# Altium PCB DAQ-2-A.PcbDoc
Units mil, origin at the board's own origin, x right, y up, seen from the top; angles counter-clockwise.
Board outline 3464.57 x 2204.72 mil, 2 copper layers (Top Layer, Bottom Layer); 77 components, 59 nets, 289 pads, 107 vias.
Unrouted connection lines stored in the file: 2.
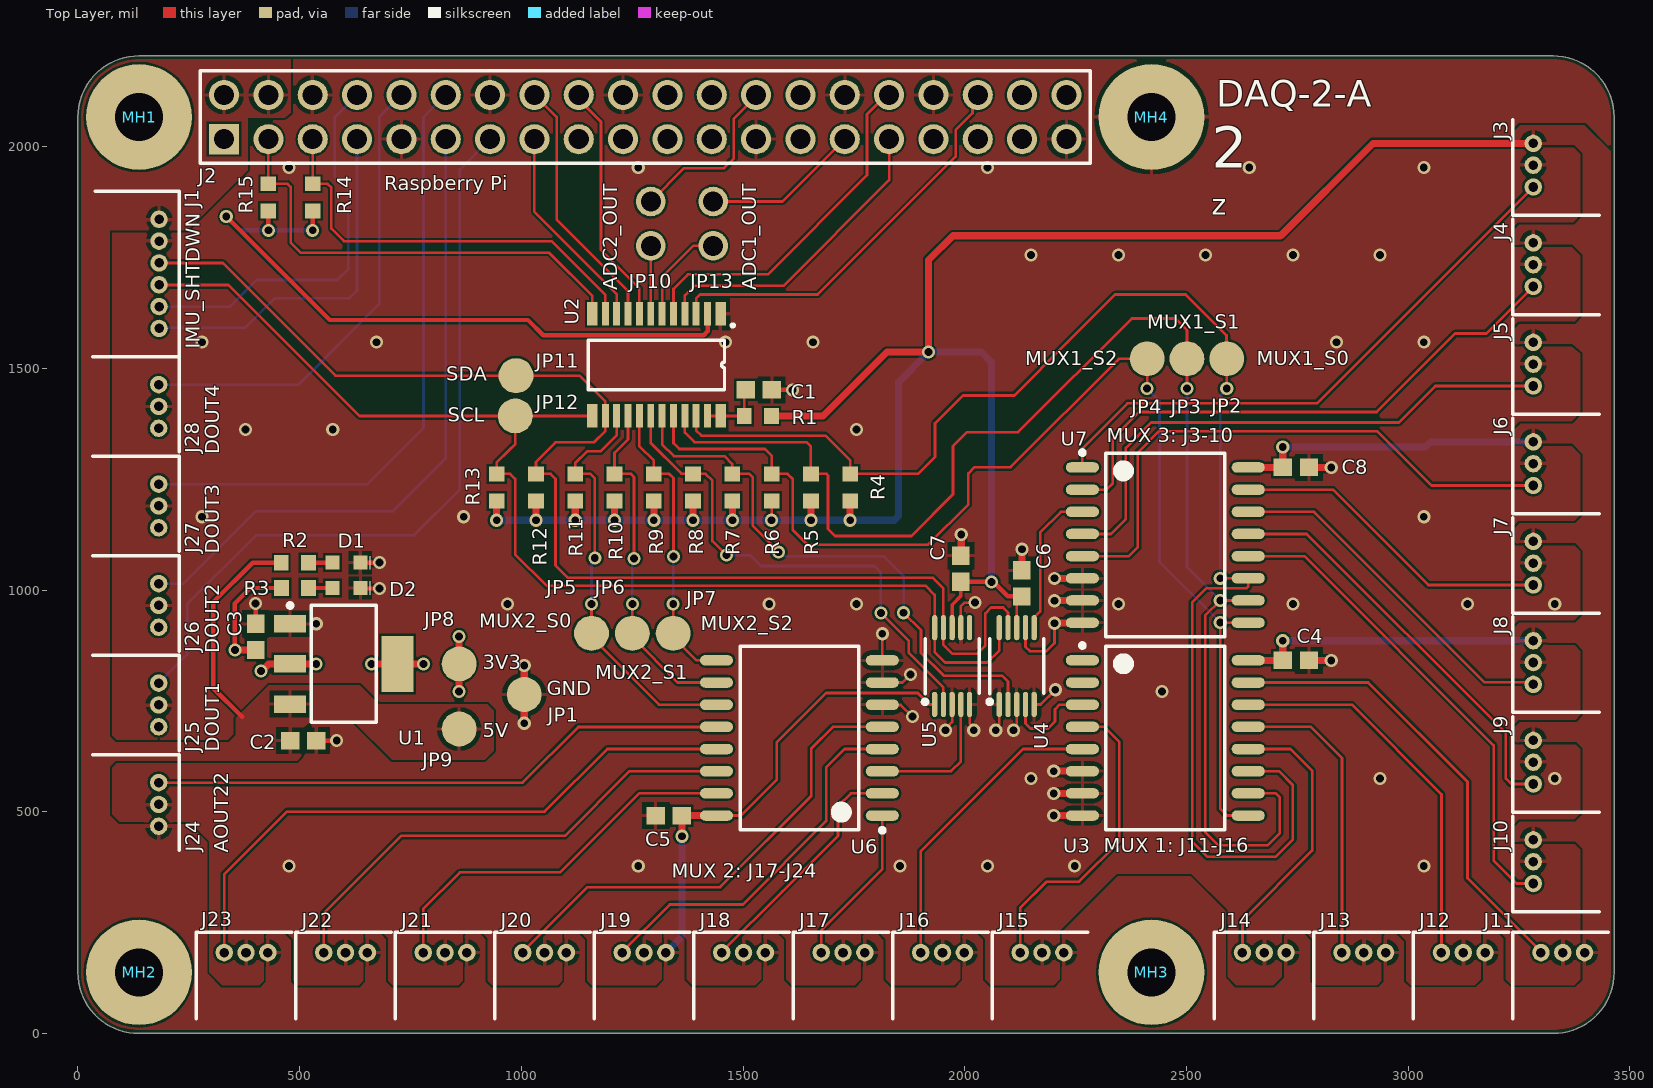
[diagram p0: Top Layer view]
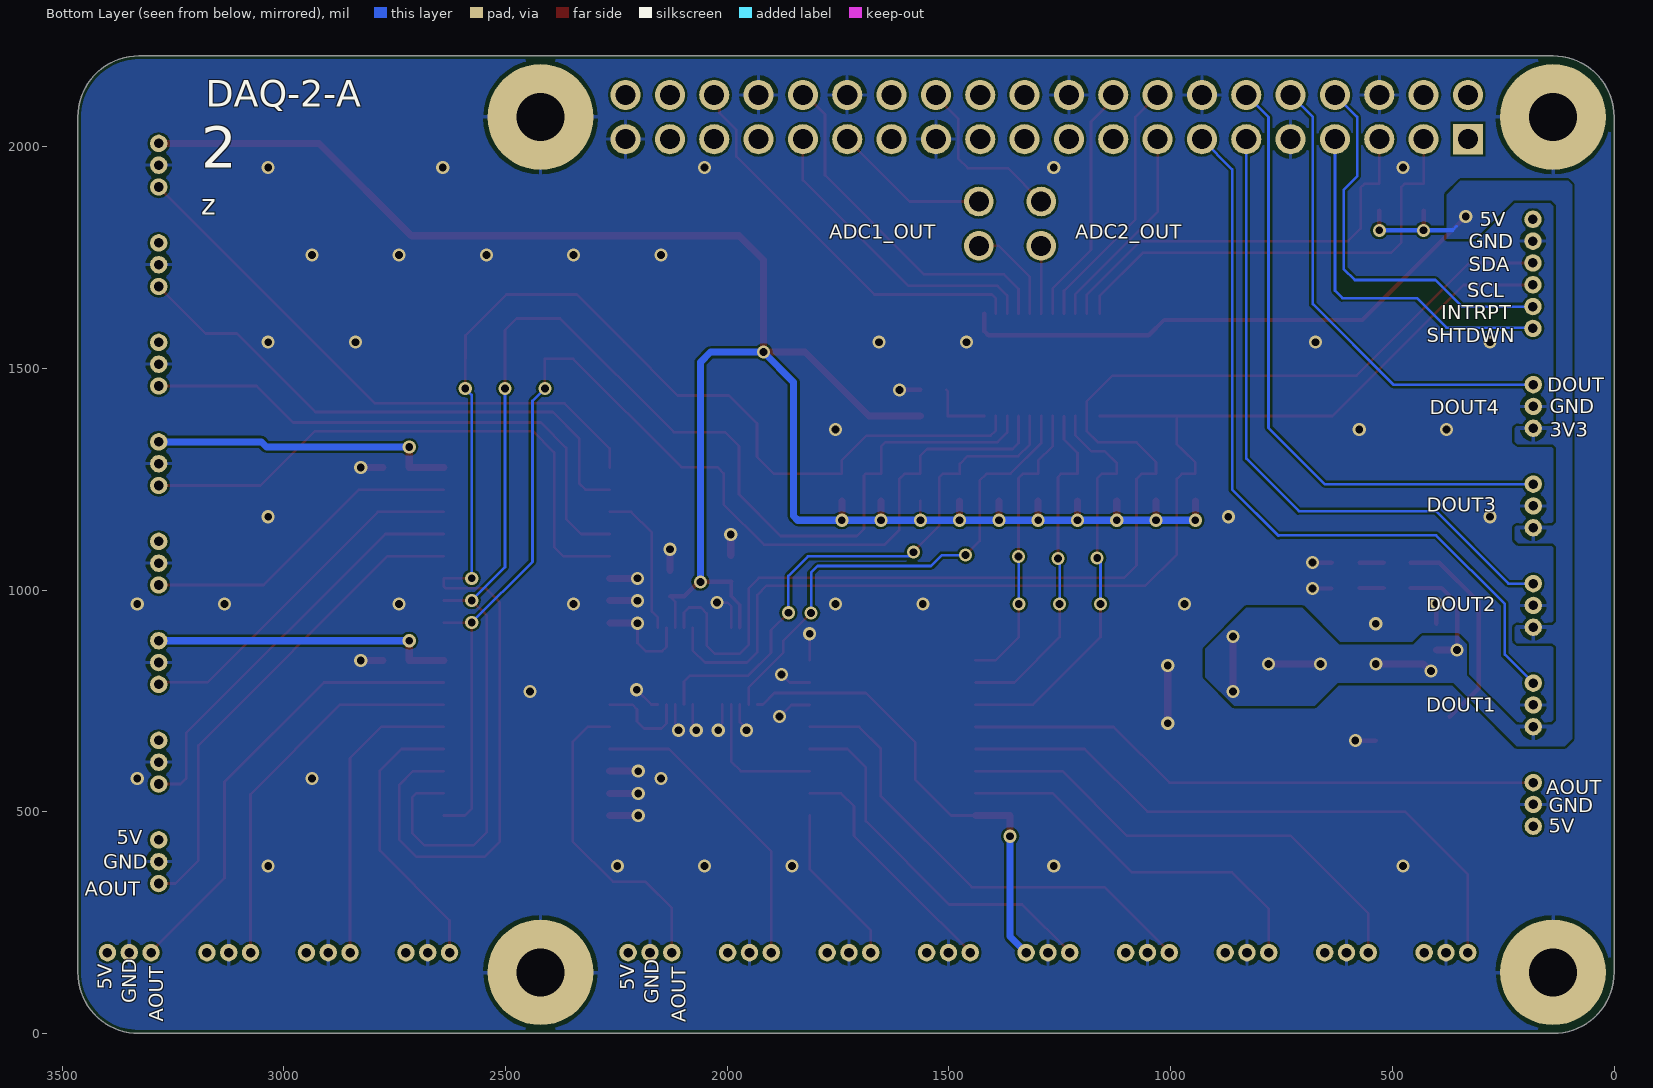
[diagram p1: Bottom Layer view, seen from below]
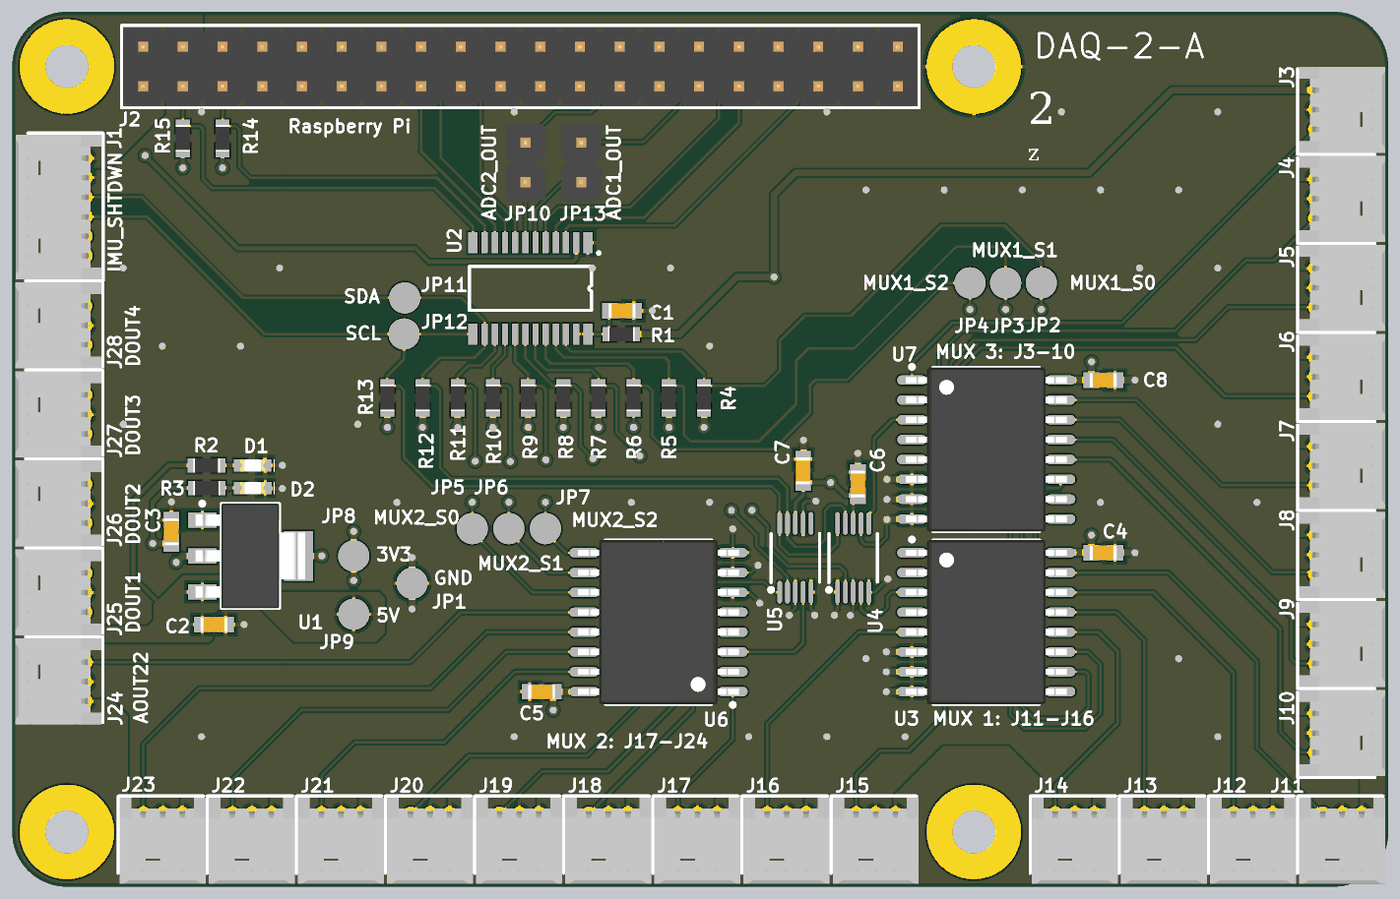
[diagram p2: 3D render of the assembled board from above, using the file's embedded part models]

## Layer stack, top to bottom
Top Solder: solder mask 0.4, Solder Resist, Dk 3.5
Top Layer: signal copper 1.4
Dielectric 1: dielectric 12.6, FR-4, Dk 4.8
Bottom Layer: signal copper 1.4
Bottom Solder: solder mask 0.4, Solder Resist, Dk 3.5

## Board outline
137.8,0 cw(c137.35,137.35) 0,137.8 0,2066.93 cw(c137.35,2067.37) 137.8,2204.72 3326.77,2204.72 cw(c3327.21,2067.37) 3464.57,2066.93 3464.57,137.8 cw(c3327.21,137.35) 3326.77,0

## Design rules (kind name [scope] priority, off if disabled: settings)
BoardOutlineClearance [All] p1: gap=7.87 ignorepadtopadclearanceinfootprint=FALSE
Clearance "Stitching HV_GND" [IsStitchingVia and InNet('HV_GND') vs (IsVia and (Not IsStitchingVia)) Or IsPad] p1: gap=5 ignorepadtopadclearanceinfootprint=FALSE
Clearance [All] p2: gap=5 ignorepadtopadclearanceinfootprint=FALSE except(7.87: Arc-SMDPad Track-SMDPad THPad-THPad; 9.84: SMDPad-Hole THPad-Hole Via-Hole Fill-Hole Poly-Hole Region-Hole Text-Hole; 10: Arc-Via Arc-Hole Track-Via Track-Hole Via-Via; 12.99: Arc-THPad Track-THPad; 21.26: SMDPad-THPad)
ComponentClearance [All] p1: gap=5 collisioncheckmode=3 verticalgap=5 showdistances=TRUE
DiffPairsRouting [All] p1: maxlimit=10 minlimit=5 mostfreqgap=5 toplayer_minwidth=5 toplayer_maxwidth=1000 toplayer_prefwidth=5 bottomlayer_minwidth=5 bottomlayer_maxwidth=1000 bottomlayer_prefwidth=5 maxuncoupledlength=500
Height [All] p1: minheight=0 maxheight=71497.94 prefheight=500
HoleSize [All] p1: absolutevalues=TRUE maxlimit=248.03 minlimit=11.81 maxpercent=80.000 minpercent=20.000
HoleToHoleClearance [All] p1: gap=9.84 allowstackedmicrovias=FALSE
MinimumAnnularRing [All] p1: minimumring=3
MinimumSolderMaskSliver [All] p1: minsoldermaskwidth=0
PlaneClearance [All] p1: clearance=5
PlaneConnect PlaneConnectPowerPads [InPadClass('PowerPads')] p1: planeconnectstyle=Direct reliefexpansion=20 reliefentries=4 reliefconductorwidth=10 reliefairgap=10
PlaneConnect [All] p2: pad.planeconnectstyle=Relief pad.reliefexpansion=11.81 pad.reliefentries=4 pad.reliefconductorwidth=10 pad.reliefairgap=5 via.planeconnectstyle=Direct via.reliefexpansion=11.81 via.reliefentries=4 via.reliefconductorwidth=5 via.reliefairgap=5
PolygonConnect PolygonConnectPowerPads [All vs (InPadClass('PowerPads'))] p1: connectstyle=Direct reliefconductorwidth=10 reliefentries=4 polygonreliefangle="90 Angle" airgapwidth=10
PolygonConnect [All] p2: thpad.connectstyle=Relief thpad.reliefconductorwidth=8 thpad.reliefentries=4 thpad.polygonreliefangle="90 Angle" thpad.airgapwidth=10 smdpad.connectstyle=Relief smdpad.reliefconductorwidth=8 smdpad.reliefentries=4 smdpad.polygonreliefangle="90 Angle" smdpad.airgapwidth=10 via.connectstyle=Direct via.reliefconductorwidth=8 via.reliefentries=4 via.polygonreliefangle="90 Angle" via.airgapwidth=10
RoutingVias [All] p1: holewidth=17.72 width=29.53 viastyle="Through Hole" minholewidth=11.81 minwidth=23.62 maxholewidth=23.62 maxwidth=259.84
SilkToSilkClearance [All] p1: silktosilkclearance=0
SilkToSolderMaskClearance [IsPad] p1: minsilkscreentomaskgap=0 clearancetoexposedcopper=TRUE
SolderMaskExpansion SolderMaskExpansion_Via [IsVia] p1: expansion=4 istentingtop=TRUE
SolderMaskExpansion [All] p2: expansion=2.95 istentingtop=FALSE
Width [All] p1: maxlimit=1000 minlimit=5.12 preferedwidth=6 minimp=50.000000 maximp=50.000000 favimp=50.000000
20 further rules are at their usual default settings.

## Classes and differential pairs
component class U_Connectors: J1 J2 J3 J4 J5 J6 J7 J8 J9 J10 J11 J12 J13 J14 J15 J16 J17 J18 J19 J20 J21 J22 J23 J24 J25 J26 J27 J28 JP8 JP9 JP10 JP11 JP12 JP13 R15
component class U_ADC_Level: C1 C2 C3 C4 C5 C6 C7 C8 D1 D2 JP2 JP3 JP4 JP5 JP6 JP7 R1 R2 R3 R4 R5 R6 R7 R8 R9 R10 R11 R12 R13 U1 U2 U3 U4 U5 U6 U7
component class root: JP1 MH1 MH2 MH3 MH4

## Components (designator, comment, footprint, x,y, rotation, side; value= is the part's Value field where it differs from the comment)
C1 "0.1uF" CAP-0603 1535.43,1451.57 r180 top
C2 "1uF" CAP-0603 508.06,660.63 r180 top
C3 "1uF" CAP-0603 400.79,894.49 r270 top
C4 "0.1uF" CAP-0603 2746.85,841.54 r180 top
C5 "0.1uF" CAP-0603 1332.68,491.34 r0 top
C6 "0.1uF" CAP-0603 2129.13,1014.96 r270 top
C7 "0.1uF" CAP-0603 1991.34,1048.03 r270 top
C8 "0.1uF" CAP-0603 2746.85,1276.57 r180 top
D1 "Green" LED-0603 652.56,1093.31 r180 top
D2 "Red" LED-0603 652.76,1036.22 r180 top
J1 "WM1744-ND" 1X6_1.25MM 183.07,1590.16 r90 top
J2 "61304021121" 2x40_Header 329.53,2016.89 r0 top
J3 "WM1743-ND" 1X3_1.25MM 3282.28,2007.48 r270 top
J4 "WM1743-ND" 1X3_1.25MM 3282.28,1783.07 r270 top
J5 "WM1743-ND" 1X3_1.25MM 3282.28,1558.66 r270 top
J6 "WM1743-ND" 1X3_1.25MM 3282.28,1334.25 r270 top
J7 "WM1743-ND" 1X3_1.25MM 3282.28,1109.84 r270 top
J8 "WM1743-ND" 1X3_1.25MM 3282.28,885.83 r270 top
J9 "WM1743-ND" 1X3_1.25MM 3282.28,661.02 r270 top
J10 "WM1743-ND" 1X3_1.25MM 3282.28,436.61 r270 top
J11 "WM1743-ND" 1X3_1.25MM 3398.03,182.28 r180 top
J12 "WM1743-ND" 1X3_1.25MM 3173.62,182.28 r180 top
J13 "WM1743-ND" 1X3_1.25MM 2949.21,182.28 r180 top
J14 "WM1743-ND" 1X3_1.25MM 2724.8,182.28 r180 top
J15 "WM1743-ND" 1X3_1.25MM 2223.62,182.28 r180 top
J16 "WM1743-ND" 1X3_1.25MM 1999.21,182.28 r180 top
J17 "WM1743-ND" 1X3_1.25MM 1774.8,182.28 r180 top
J18 "WM1743-ND" 1X3_1.25MM 1550.39,182.28 r180 top
J19 "WM1743-ND" 1X3_1.25MM 1325.98,182.28 r180 top
J20 "WM1743-ND" 1X3_1.25MM 1101.57,182.28 r180 top
J21 "WM1743-ND" 1X3_1.25MM 877.17,182.28 r180 top
J22 "WM1743-ND" 1X3_1.25MM 652.76,182.28 r180 top
J23 "WM1743-ND" 1X3_1.25MM 428.35,182.28 r180 top
J24 "WM1743-ND" 1X3_1.25MM 182.28,467.32 r90 top
J25 "WM1743-ND" 1X3_1.25MM 182.28,691.73 r90 top
J26 "WM1743-ND" 1X3_1.25MM 182.28,916.14 r90 top
J27 "WM1743-ND" 1X3_1.25MM 182.28,1140.55 r90 top
J28 "WM1743-ND" 1X3_1.25MM 182.28,1364.96 r90 top
JP1 "Testpoint2" TP2 1006.69,764.57 r0 top
JP2 "Testpoint2" TP2 2590.94,1521.66 r180 top
JP3 "Testpoint2" TP2 2501.18,1521.66 r180 top
JP4 "Testpoint2" TP2 2411.42,1521.66 r180 top
JP5 "Testpoint2" TP2 1158.27,902.36 r0 top
JP6 "Testpoint2" TP2 1250.39,902.36 r0 top
JP7 "Testpoint2" TP2 1342.52,902.36 r0 top
JP8 "Testpoint2" TP2 859.84,833.46 r0 top
JP9 "Testpoint2" TP2 859.84,686.61 r0 top
JP10 "732-5315-ND" 2PIN-JP 1292.13,1876.38 r270 top
JP11 "Testpoint2" TP2 988.13,1483.7 r0 top
JP12 "Testpoint2" TP2 986.55,1392.76 r0 top
JP13 "732-5315-ND" 2PIN-JP 1432.68,1876.38 r270 top
MH1 "MountingHole" MH2.7MM 137.8,2066.93 r0 top
MH2 "MountingHole" MH2.7MM 137.8,137.8 r0 top
MH3 "MountingHole" MH2.7MM 2421.26,137.8 r0 top
MH4 "MountingHole" MH2.7MM 2421.26,2066.93 r0 top
R1 "200K" RES-0603 1533.46,1392.52 r0 top
R2 "1K" RES-0603 489.17,1061.81 r0 top
R3 "1K" RES-0603 489.37,1004.72 r0 top
R4 "5K" RES-0603 1741.73,1231.5 r90 top
R5 "5K" RES-0603 1653.15,1231.5 r90 top
R6 "5K" RES-0603 1564.57,1231.5 r90 top
R7 "5K" RES-0603 1475.98,1231.5 r90 top
R8 "5K" RES-0603 1387.4,1231.5 r90 top
R9 "5K" RES-0603 1298.82,1231.5 r90 top
R10 "5K" RES-0603 1210.24,1231.5 r90 top
R11 "5K" RES-0603 1121.65,1231.5 r90 top
R12 "5K" RES-0603 1033.07,1231.5 r270 top
R13 "5K" RES-0603 944.49,1231.5 r90 top
R14 "5K" RES-0603 529.53,1885.83 r270 top
R15 "5K" RES-0603 429.53,1885.83 r270 top
U1 "TC2117-3.3VDBTR" SOT223 599.59,833.46 r0 top
U2 "NVT2010PW,118" TSSOP65P660X110-24 1304.72,1507.87 r270 top
U3 "296-37427-1-ND" 16-SOIC 2452.36,666.54 r0 top
U4 "ADS1115IDGST" VSSOP50P310X310-10P 2117.32,828.74 r90 top
U5 "ADS1115IDGST" VSSOP50P310X310-10P 1971.65,828.74 r90 top
U6 "296-37427-1-ND" 16-SOIC 1627.17,666.54 r180 top
U7 "296-37427-1-ND" 16-SOIC 2452.36,1101.57 r0 top

## Footprints (in the part's own frame and the unit in brackets; to place one, negate y for a bottom-side part, rotate by r counter-clockwise, add the part's x,y. Pads: shape width x height; smd on the part's side, far side on the other; paste and mask are expansions set on the pad)
1X3_1.25MM [mm]
  round 1 hole 0.55: 1(0,0) 2(1.25,0) 3(2.5,0)
  silkscreen extent -1.36,-1.17 4.11,3.77, body extent -1.49,-1.07 4.01,4.43, height 3.55
1X6_1.25MM [mm]
  round 1 hole 0.55: 1(0,0) 2(1.25,0) 3(2.5,0) 4(3.75,0) 5(5,0) 6(6.25,0)
  silkscreen extent -1.61,-1.16 7.85,3.66, body extent -1.5,-1.07 7.75,4.43, height 3.55
2PIN-JP [mm]
  round 1.7 hole 1.15: 1(0,0) 2(2.54,0)
  body extent -1.24,-1.27 3.84,1.27, height 8.57
2x40_Header [mm]
  rect 1.725x1.725 hole 1.15: 1(0,0)
  round 1.725 hole 1.15: 2(0,2.54) 3(2.54,0) 4(2.54,2.54) 5(5.08,0) 6(5.08,2.54) 7(7.62,0) 8(7.62,2.54) 9(10.16,0) 10(10.16,2.54) 11(12.7,0) 12(12.7,2.54) 13(15.24,0) 14(15.24,2.54) 15(17.78,0) 16(17.78,2.54) 17(20.32,0) 18(20.32,2.54) 19(22.86,0) 20(22.86,2.54) 21(25.4,0) 22(25.4,2.54) 23(27.94,0) 24(27.94,2.54) 25(30.48,0) 26(30.48,2.54) 27(33.02,0) 28(33.02,2.54) 29(35.56,0) 30(35.56,2.54) 31(38.1,0) 32(38.1,2.54) 33(40.64,0) 34(40.64,2.54) 35(43.18,0) 36(43.18,2.54) 37(45.72,0) 38(45.72,2.54) 39(48.26,0) 40(48.26,2.54)
  silkscreen extent -1.37,-1.37 49.63,3.91, body extent -1.27,-1.27 49.53,3.81, height 8.57
16-SOIC [mm] "SOIC, 16-Leads, Body 10.30x7.50mm, Pitch 1.27mm, IPC Medium Density"
  oval 1.9x0.6 smd: 1(-4.75,4.445) 2(-4.75,3.175) 3(-4.75,1.905) 4(-4.75,0.635) 5(-4.75,-0.635) 6(-4.75,-1.905) 7(-4.75,-3.175) 8(-4.75,-4.445) 9(4.75,-4.445) 10(4.75,-3.175) 11(4.75,-1.905) 12(4.75,-0.635) 13(4.75,0.635) 14(4.75,1.905) 15(4.75,3.175) 16(4.75,4.445)
  silkscreen extent -4.87,-5.25 3.4,5.42, body extent -5.15,-5.25 5.15,5.25, height 2.65
CAP-0603 [mm] "Chip Capacitor, 2-Leads, Body 1.60x0.80mm, IPC Medium Density"
  rect 1.05x1 smd: 1(-0.75,0) 2(0.75,0)
  body extent -0.87,-0.48 0.87,0.48, height 0.9
LED-0603 [mm]
  rect 0.8x0.8 smd: 1(2,0.8) 2(0.4,0.8)
  silkscreen extent -0.18,0.43 -0.18,1.17, body extent 0.4,0.4 2,1.2, height 0.7
MH2.7MM [mm] "Mounting Hole, 2.7mm"
  round 6.05 hole 2.75: 1(0,0)
  body extent -0.25,-0.25 0.25,0.25, height 20
RES-0603 [mm] "Chip Resistor, 2-Leads, Body 1.60x0.80mm, IPC Medium Density"
  rect 0.85x0.9 smd: 1(-0.775,0) 2(0.775,0)
  body extent -0.85,-0.45 0.85,0.45, height 0.55
SOT223 [mm] "SOT223, 4-Leads, Body 6.50x7.00mm (avg), Pitch 2.30mm, IPC Medium Density"
  rect 1.85x1 smd: 1(-3.075,-2.3) 2(-3.075,2.3) 3(-3.075,0)
  rect 1.85x3.2 smd: 3(3.075,0)
  silkscreen extent -3.2,-3.35 1.85,3.47, body extent -3.5,-3.35 3.5,3.35, height 1.8
TP2 [mm]
  round 2 smd: 1(0,0)
TSSOP65P660X110-24 [mm] "TSSOP, 24-Leads, Body 7.9x4.50mm, Pitch 0.65mm, IPC Medium Density"
  rect 1.35x0.6 smd: 1(-2.925,3.675) 12(-2.925,-3.675) 13(2.925,-3.675) 24(2.925,3.675)
  rect 1.35x0.4 smd: 2(-2.925,2.925) 3(-2.925,2.275) 4(-2.925,1.625) 5(-2.925,0.975) 6(-2.925,0.325) 7(-2.925,-0.325) 8(-2.925,-0.975) 9(-2.925,-1.625) 10(-2.925,-2.275) 11(-2.925,-2.925) 14(2.925,-2.925) 15(2.925,-2.275) 16(2.925,-1.625) 17(2.925,-0.975) 18(2.925,-0.325) 19(2.925,0.325) 20(2.925,0.975) 21(2.925,1.625) 22(2.925,2.275) 23(2.925,2.925)
  silkscreen extent -2.34,-3.9 1.42,4.45, body extent -2.25,-3.95 2.25,3.95, height 1.1
VSSOP50P310X310-10P [mm] "VSSOP, 10-Leads, Body 3.1x3.1mm (max), Pitch 0.50mm, IPC Low Density"
  oval 1.45x0.3 smd: 1(-2.2,1) 2(-2.2,0.5) 3(-2.2,0) 4(-2.2,-0.5) 5(-2.2,-1) 6(2.2,-1) 7(2.2,-0.5) 8(2.2,0) 9(2.2,0.5) 10(2.2,1)
  silkscreen extent -2.17,-1.55 1.55,1.67, body extent -1.55,-1.55 1.55,1.55, height 1.1

## Part data
C1 C4 C5 C6 C7 C8: library part 0603-0.1uF-16V, "CAP CER 0.1UF 16V X7R 0603", Capacitance=100nF, Case Code (Imperial)=0603, Case Code (Metric)=1608, Dielectric=X7R, Dielectric Material=Ceramic, Manufacturer=KEMET, Manufacturer Part Number=C0603C104M4RACTU, Max Operating Temperature=125°C, Min Operating Temperature=-55°C, Package Quantity=1, Supplier Part Number 1=399-1099-6-ND, Tolerance=20%, Voltage Rating=16V, Case/Package=0603, ComponentLink1Description=https://www.verical.com/server-webapp/html/getDatasheet?partID=66190&src-supplier=Verical, ComponentLink1URL=https://www.verical.com/server-webapp/html/getDatasheet?partID=66190&src-supplier=Verical, ComponentLink2Description=http://www.farnell.com/datasheets/2746055.pdf?src-supplier=Element14, ComponentLink2URL=http://www.farnell.com/datasheets/2746055.pdf?src-supplier=Element14, ComponentLink3Description=http://www.farnell.com/datasheets/2123765.pdf?src-supplier=Element14, ComponentLink3URL=http://www.farnell.com/datasheets/2123765.pdf?src-supplier=Element14, ComponentLink4Description=http://www.alliedelec.com/m/d/9bfe7773041ffe9d406e68bc7b377fdd.pdf?src-supplier=Allied+Electronics, ComponentLink4URL=http://www.alliedelec.com/m/d/9bfe7773041ffe9d406e68bc7b377fdd.pdf?src-supplier=Allied+Electronics, ComponentLink5Description=https://www.verical.com/server-webapp/html/getDatasheet?partID=302288&src-supplier=Verical, ComponentLink5URL=https://www.verical.com/server-webapp/html/getDatasheet?partID=302288&src-supplier=Verical, Depth=0.8mm, Height=0.8mm, Lead Pitch=0.7mm, Length=1.6mm, Mount="Surface Mount,PCB", Number of Pins=2, Packaging="Tape and Reel", Pricing 1="1=0.1, 10=0.036, 100=0.0161, 500=0.01152, 1000=0.00904 (USD)", Radiation Hardening=No, REACH SVHC="No SVHC", Stock 1=254524, Supplier 1=Digi-Key, Termination=SMD/SMT, Thickness=0.034inch, Voltage Rating (DC)=16V, Width=0.031inch
C2 C3: library part 0603-1uF-16V, "CAP CER 1UF 16V X7R 0603", Case Code (Imperial)=0603, Case Code (Metric)=1608, Dielectric=X7R, Dielectric Material=Ceramic, Manufacturer=KEMET, Manufacturer Part Number=C0603C105K4RACTU, Max Operating Temperature=125°C, Min Operating Temperature=-55°C, Package Quantity=4000, Supplier Part Number 1=399-7847-6-ND, Tolerance=10%, Voltage=16V, Capacitance=1uF, Case/Package=0603, ComponentLink1Description=http://www.mouser.com/ds/2/212/KEM_C1002_X7R_SMD-1102033.pdf?src-supplier=Mouser, ComponentLink1URL=http://www.mouser.com/ds/2/212/KEM_C1002_X7R_SMD-1102033.pdf?src-supplier=Mouser, ComponentLink2Description=http://www.kemet.com/kemet/web/homepage/kechome.nsf/file/Commercial%20Ceramic%20Chips%20X7R%20Dielectric/$file/KEM_C1002_X7R_SMD.pdf?src-supplier=Element14, ComponentLink2URL=http://www.kemet.com/kemet/web/homepage/kechome.nsf/file/Commercial%20Ceramic%20Chips%20X7R%20Dielectric/$file/KEM_C1002_X7R_SMD.pdf?src-supplier=Element14, ComponentLink3Description=https://www.verical.com/server-webapp/html/getDatasheet?partID=385479&src-supplier=Verical, ComponentLink3URL=https://www.verical.com/server-webapp/html/getDatasheet?partID=385479&src-supplier=Verical, ComponentLink4Description=http://www.kemet.com/kemet/web/homepage/kechome.nsf/vapubfiles/KEM_C1002_X7R_SMD.pdf/$file/KEM_C1002_X7R_SMD.pdf?src-supplier=Element14, ComponentLink4URL=http://www.kemet.com/kemet/web/homepage/kechome.nsf/vapubfiles/KEM_C1002_X7R_SMD.pdf/$file/KEM_C1002_X7R_SMD.pdf?src-supplier=Element14, Contact Plating=Tin,Matte, Depth=0.8mm, Dissipation Factor=3.5%, Height=0.8mm, Length=1.6mm, Mount="Surface Mount,PCB", Number of Pins=2, Packaging="Tape and Reel", Pricing 1="1=0.12, 10=0.088, 100=0.0391, 500=0.02792, 1000=0.02193 (USD)", Radiation Hardening=No, REACH SVHC="No SVHC", Stock 1=600463, Supplier 1=Digi-Key, Termination=SMD/SMT, Thickness=0.034inch, Voltage Rating=16V, Voltage Rating (DC)=16V, Width=0.031inch
D1: library part LED-Green, "LED GREEN CLEAR 0603 SMD", Case Code (Imperial)=0603, Case Code (Metric)=1608, Forward Current=30mA, Forward Voltage=2V, Manufacturer="Wurth Electronics", Manufacturer Part Number=150060VS75000, Max Operating Temperature=85°C, Min Operating Temperature=-40°C, Package Quantity=1, Supplier Part Number 1=732-4980-1-ND, Test Current=20mA, Case/Package=0603, Color=Green, ComponentLink1Description=https://katalog.we-online.de/led/datasheet/150060VS75000.pdf?src-supplier=Digi-Key, ComponentLink1URL=https://katalog.we-online.de/led/datasheet/150060VS75000.pdf?src-supplier=Digi-Key, Dominant Wavelength=570nm, Height=0.7mm, Length=1.6mm, Lens Style=Clear,Rectangular, Luminous Intensity=40mcd, Mount="Surface Mount", Number of Pins=2, Packaging="Tape and Reel", Pricing 1="1=0.14, 50=0.133, 100=0.114, 500=0.099 (USD)", REACH SVHC=Unknown, Stock 1=118118, Supplier 1=Digi-Key, Viewing Angle=140°, Wavelength=570nm, Width=0.8mm
D2: library part LED-Red, "LED RED CLEAR 0603 SMD", Case Code (Imperial)=0603, Case Code (Metric)=1608, Forward Current=30mA, Forward Voltage=2V, Manufacturer="Wurth Electronics", Manufacturer Part Number=150060RS75000, Max Operating Temperature=85°C, Min Operating Temperature=-40°C, Package Quantity=1, Supplier Part Number 1=732-4978-6-ND, Test Current=20mA, Case/Package=0603, Color=Red, ComponentLink1Description=https://katalog.we-online.de/led/datasheet/150060RS75000.pdf?src-supplier=Digi-Key, ComponentLink1URL=https://katalog.we-online.de/led/datasheet/150060RS75000.pdf?src-supplier=Digi-Key, ComponentLink2Description=http://www.produktinfo.conrad.com/datenblaetter/750000-774999/759428-da-01-en-CHIPLED_0603_W_KL_ROT_150060RS75000.pdf?src-supplier=Conrad, ComponentLink2URL=http://www.produktinfo.conrad.com/datenblaetter/750000-774999/759428-da-01-en-CHIPLED_0603_W_KL_ROT_150060RS75000.pdf?src-supplier=Conrad, Dominant Wavelength=625nm, Height=0.7mm, Length=1.6mm, Lens Style=Clear,Rectangular, Luminous Intensity=250mcd, Mount="Surface Mount", Packaging="Cut Tape", Pricing 1="1=0.14, 50=0.133, 100=0.114, 500=0.099 (USD)", REACH SVHC=Unknown, Stock 1=18518, Supplier 1=Digi-Key, Viewing Angle=140°, Wavelength=625nm, Width=0.8mm
J1: library part CONN_1X6_1.25MM, "CONN HEADER R/A 6POS 1.25MM", Supplier Part Number 1=WM1746-ND, Supplier 1=Digi-Key
J2: library part CONN_2X40, "CONN HEADER VERT 40POS 2.54MM", Supplier Part Number 1=732-5310-ND, Supplier 1=Digi-Key
J3 J4 J5 J6 J7 J8 J9 J10 J11 J12 J13 J14 J15 J16 J17 J18 J19 J20 J21 J22 J23 J24 J25 J26 J27 J28: library part CONN_1X3_1.25MM, "CONN HEADER R/A 3POS 1.25MM", Supplier 1=Digi-Key, Supplier Part Number 1=WM1743-ND
JP1 JP2 JP3 JP4 JP5 JP6 JP7 JP8 JP9 JP11 JP12: "Single layer pad TP"
JP10 JP13: library part 2PIN-TEST, "CONN HEADER VERT 2POS 2.54MM"
MH1 MH2 MH3 MH4: library part MH2.75mm, "Mounting hole, 2.7mm", Case=TH
R1: library part 0603-200KR, "RES SMD 200K OHM 1% 1/10W 0603", Supplier Part Number 1=RMCF0603FT200KCT-ND, Supplier 1=Digi-Key
R2 R3: library part 0603-1KR, "RES SMD 1K OHM 1% 1/10W 0603", Case Code (Imperial)=0603, Case Code (Metric)=1608, Manufacturer="Vishay Dale", Manufacturer Part Number=CRCW06031K00FKEA, Max Operating Temperature=155°C, Max Power Dissipation=100mW, Min Operating Temperature=-55°C, Package Quantity=10, Resistance=1kR, Supplier Part Number 1=541-1.00KHCT-ND, Temperature Coefficient=100ppm/°C, Tolerance=1%, Voltage Rating=75V, Case/Package=0603, ComponentLink1Description=http://www.vishay.com/docs/20035/dcrcwe3.pdf?src-supplier=Digi-Key, ComponentLink1URL=http://www.vishay.com/docs/20035/dcrcwe3.pdf?src-supplier=Digi-Key, ComponentLink2Description=http://uk.rs-online.com/webdocs/0d98/0900766b80d98afc.pdf?src-supplier=RSComponents, ComponentLink2URL=http://uk.rs-online.com/webdocs/0d98/0900766b80d98afc.pdf?src-supplier=RSComponents, ComponentLink3Description=http://www.vishay.com/docs/20035/dcrcwe3.pdf?src-supplier=Avnet, ComponentLink3URL=http://www.vishay.com/docs/20035/dcrcwe3.pdf?src-supplier=Avnet, ComponentLink4Description=http://www.vishay.com/docs/20035/dcrcwe3.pdf?src-supplier=Avnet+Asia, ComponentLink4URL=http://www.vishay.com/docs/20035/dcrcwe3.pdf?src-supplier=Avnet+Asia, ComponentLink5Description=http://www.farnell.com/datasheets/2310790.pdf?src-supplier=Element14, ComponentLink5URL=http://www.farnell.com/datasheets/2310790.pdf?src-supplier=Element14, ComponentLink6Description=https://www.distrelec.biz/Web/Downloads/a_/en/flD-CRCW-e3_data_en.pdf?mime=application%2Fpdf&src-supplier=Distrelec, ComponentLink6URL=https://www.distrelec.biz/Web/Downloads/a_/en/flD-CRCW-e3_data_en.pdf?mime=application%2Fpdf&src-supplier=Distrelec, ComponentLink7Description=http://www.vishay.com/docs/20035/dcrcwe3.pdf?src-supplier=Future+Electronics, ComponentLink7URL=http://www.vishay.com/docs/20035/dcrcwe3.pdf?src-supplier=Future+Electronics, ComponentLink8Description=http://www.vishay.com/docs/20035/dcrcwe3.pdf?src-supplier=Avnet+Europe, ComponentLink8URL=http://www.vishay.com/docs/20035/dcrcwe3.pdf?src-supplier=Avnet+Europe, Composition="Thick Film", Contact Plating=Tin, Depth=0.85mm, Features="Automotive AEC-Q200", Height=0.45mm, Lead Free="Lead Free", Length=1.55mm, Military Standard=Not, Mount="Surface Mount", Number of Pins=2, Number of Terminations=2, Packaging="Tape and Reel", Power Rating=100mW, Pricing 1="1=0.1, 10=0.034, 100=0.0139, 1000=0.00623, 2500=0.0054 (USD)", Radiation Hardening=No, REACH SVHC=Unknown, Stock 1=671453, Supplier 1=Digi-Key, Termination=SMD/SMT, Voltage Rating (DC)=75V, Weight=7.1E-05oz, Width=0.033inch
R4 R5 R6 R7 R8 R9 R10 R11 R12 R13 R14 R15: library part 0603-5KR, "RES SMD 4.99K OHM 1% 1/10W 0603", Case Code (Imperial)=0603, Case Code (Metric)=1608, Manufacturer=Bourns, Manufacturer Part Number=CR0603-FX-4991ELF, Max Operating Temperature=155°C, Max Power Dissipation=100mW, Min Operating Temperature=-55°C, Package Quantity=1, Resistance=4.99kR, Supplier Part Number 1=CR0603-FX-4991ELFDKR-ND, Temperature Coefficient=100ppm/°C, Tolerance=1%, Voltage Rating=50V, Case/Package=0603, ComponentLink1Description=https://www.bourns.com/docs/Product-Datasheets/CHPREZTR.pdf?src-supplier=Digi-Key, ComponentLink1URL=https://www.bourns.com/docs/Product-Datasheets/CHPREZTR.pdf?src-supplier=Digi-Key, ComponentLink2Description=http://www.bourns.com/pdfs/chpreztr.pdf?src-supplier=Avnet, ComponentLink2URL=http://www.bourns.com/pdfs/chpreztr.pdf?src-supplier=Avnet, Composition="Thick Film", Contact Plating=Tin, Features="Moisture Resistant", Height=0.022inch, Length=0.063inch, Mount="Surface Mount", Number of Terminations=2, Packaging="Tape and Reel", Power Rating=100mW, Pricing 1="1=0.1, 10=0.02, 25=0.0144, 50=0.011, 100=0.0082, 250=0.00624, 500=0.00498, 1000=0.00367 (USD)", Radiation Hardening=No, Stock 1=70557, Supplier 1=Digi-Key, Termination=SMD/SMT, Thickness=457um, Width=0.8mm
U1: library part LDO-3.3V-800mA, "IC REG LIN 3.3V 800MA SOT223-3", Case/Package=SOT-223-3, Dropout Voltage=1.2V, Manufacturer=Microchip, Max Input Voltage=6V, Max Operating Temperature=125°C, Max Output Current=800mA, Max Output Voltage=3.3V, Min Input Voltage=2.7V, Min Operating Temperature=-40°C, Package Quantity=4000, Quiescent Current=80uA, Supplier Part Number 1=TC2117-3.3VDBDKR-ND, Accuracy=0.5%, ComponentLink1Description=http://www.farnell.com/datasheets/1669439.pdf?src-supplier=Element14, ComponentLink1URL=http://www.farnell.com/datasheets/1669439.pdf?src-supplier=Element14, ComponentLink2Description=http://ww1.microchip.com/downloads/en/DeviceDoc/21665D.pdf?src-supplier=Avnet+Europe, ComponentLink2URL=http://ww1.microchip.com/downloads/en/DeviceDoc/21665D.pdf?src-supplier=Avnet+Europe, ComponentLink3Description=http://www.microchip.com/mymicrochip/filehandler.aspx?ddocname=en023833&src-supplier=Digi-Key, ComponentLink3URL=http://www.microchip.com/mymicrochip/filehandler.aspx?ddocname=en023833&src-supplier=Digi-Key, ComponentLink4Description=http://ww1.microchip.com/downloads/en/DeviceDoc/21665D.pdf?src-supplier=Future+Electronics, ComponentLink4URL=http://ww1.microchip.com/downloads/en/DeviceDoc/21665D.pdf?src-supplier=Future+Electronics, ComponentLink5Description=http://ww1.microchip.com/downloads/en/DeviceDoc/21665D.pdf?src-supplier=Avnet, ComponentLink5URL=http://ww1.microchip.com/downloads/en/DeviceDoc/21665D.pdf?src-supplier=Avnet, ComponentLink6Description=http://www.farnell.com/datasheets/1669439.pdf?src-supplier=Newark, ComponentLink6URL=http://www.farnell.com/datasheets/1669439.pdf?src-supplier=Newark, Height=1.7mm, Lead Free="Lead Free", Length=6.7mm, Manufacturer Part Number=TC2117-3.3VDBTR, Max Supply Voltage=6V, Min Output Voltage=3.3V, Min Supply Voltage=2.7V, Mount="Surface Mount", Nominal Output Voltage=3.3V, Number of Outputs=1, Number of Pins=3, Number of Regulators=1, Output Current=800mA, Output Type=Fixed, Output Voltage=3.3V, Packaging="Tape and Reel", Polarity=Positive, Pricing 1="1=0.73, 25=0.61, 100=0.55 (USD)", Radiation Hardening=No, REACH SVHC="No SVHC", Stock 1=3126, Supplier 1=Digi-Key, Termination=SMD/SMT, Width=3.7mm
U2: library part IC_NVT2010PW, "NVT2010PW/TSSOP24/REEL13//", Case/Package=TSSOP, Manufacturer="NXP Semiconductors", Max Operating Temperature=85°C, Max Supply Voltage=5.5V, Min Operating Temperature=-40°C, Min Supply Voltage=1V, Package Quantity=1, Supplier Part Number 1=568-5299-1-ND, Category="Interface ICs", ComponentLink1Description=https://datasheet.ciiva.com/1899/nvt2008-nvt2010-1899186.pdf?src-supplier=Digi-Key, ComponentLink1URL=https://datasheet.ciiva.com/1899/nvt2008-nvt2010-1899186.pdf?src-supplier=Digi-Key, ComponentLink2Description=https://datasheet.ciiva.com/1899/nvt2008-nvt2010-1899187.pdf?src-supplier=Digi-Key, ComponentLink2URL=https://datasheet.ciiva.com/1899/nvt2008-nvt2010-1899187.pdf?src-supplier=Digi-Key, ComponentLink3Description=https://datasheet.ciiva.com/8244/nvt2008-nvt2010-8244294.pdf?src-supplier=Avnet, ComponentLink3URL=https://datasheet.ciiva.com/8244/nvt2008-nvt2010-8244294.pdf?src-supplier=Avnet, ComponentLink4Description=https://datasheet.ciiva.com/1899/nvt2008-nvt2010-1899185.pdf?src-supplier=Digi-Key, ComponentLink4URL=https://datasheet.ciiva.com/1899/nvt2008-nvt2010-1899185.pdf?src-supplier=Digi-Key, Lead Free="Lead Free", Logic Function=Translator, Manufacturer Part Number=NVT2010PW,118, Mount="Surface Mount", Number of Bits=10, Number of Channels=10, Number of Pins=24, Output Type=Voltage, Packaging="Tape and Reel", Pricing 1="1=1.02000, 10=0.91600, 25=0.86920, 100=0.83480 (USD)", Propagation Delay=1.5ns, Radiation Hardening=No, RoHS=Yes, RoHS Compliant=Yes, Series=-, Stock 1=3117, Supplier 1=Digi-Key, Turn-On Delay Time=1.5ns
U3 U6 U7: library part MUX-SN74LV4051ATDWRQ1, "IC MUX/DEMUX 8X1 16SOIC", Case/Package=SOIC, Manufacturer="Texas Instruments", Manufacturer Part Number=SN74LV4051ATDWRQ1, Max Operating Temperature=105°C, Max Supply Voltage=5.5V, Min Operating Temperature=-40°C, Min Supply Voltage=2V, On-State Resistance=75R, Operating Supply Current=20uA, Package Quantity=2000, Supplier Part Number 1=296-37427-6-ND, -3db Bandwidth=35MHz, Bandwidth=35MHz, ComponentLink1Description=https://www.verical.com/server-webapp/html/getDatasheet?partID=348177&src-supplier=Verical, ComponentLink1URL=https://www.verical.com/server-webapp/html/getDatasheet?partID=348177&src-supplier=Verical, ComponentLink2Description=http://focus.ti.com/lit/ds/symlink/sn74lv4051a-q1.pdf?src-supplier=Avnet, ComponentLink2URL=http://focus.ti.com/lit/ds/symlink/sn74lv4051a-q1.pdf?src-supplier=Avnet, ComponentLink3Description=http://www.ti.com/lit/ds/symlink/sn74lv4051a-q1.pdf?src-supplier=Digi-Key, ComponentLink3URL=http://www.ti.com/lit/ds/symlink/sn74lv4051a-q1.pdf?src-supplier=Digi-Key, Lead Free="Lead Free", Logic Function=Multiplexer,Demultiplexer, Mount="Surface Mount", Number of Bits=8, Number of Channels=1, Number of Circuits=1, Number of Inputs=8, Number of Outputs=1, Number of Pins=16, Packaging="Tape and Reel", Pricing 1="1=0.7, 10=0.617, 25=0.5796, 100=0.4731, 250=0.43944, 500=0.374, 1000=0.2992 (USD)", Propagation Delay=7ns, Radiation Hardening=No, Stock 1=2359, Supplier 1=Digi-Key, Supply Type=Single, Turn-Off Delay Time=20ns, Turn-On Delay Time=20ns, Weight=0.014829oz
U4 U5: library part IC_ADS1115, "TEXAS INSTRUMENTS - ADS1115IDGST . - Analogue to Digital Converter, 16 bit, 860 SPS, Differential, Single Ended, I2C, Single, 2 V", Case/Package=VSSOP, Manufacturer="Texas Instruments", Max Operating Temperature=125°C, Max Supply Voltage=5.5V, Min Operating Temperature=-40°C, Min Supply Voltage=2V, Package Quantity=2500, Power Dissipation=900uW, Supplier Part Number 1=296-24934-1-ND, Category="Analog to Digital Converters (ADCs)", ComponentLink1Description=https://datasheet.ciiva.com/4031/47725463s8438921n7713-4031028.pdf?src-supplier=Arrow+Electronics, ComponentLink1URL=https://datasheet.ciiva.com/4031/47725463s8438921n7713-4031028.pdf?src-supplier=Arrow+Electronics, ComponentLink2Description=https://datasheet.ciiva.com/1304/ads1113-1304266.pdf?src-supplier=Digi-Key, ComponentLink2URL=https://datasheet.ciiva.com/1304/ads1113-1304266.pdf?src-supplier=Digi-Key, ComponentLink3Description=https://datasheet.ciiva.com/25993/sbas444b-25993205.pdf?src-supplier=Avnet+Europe, ComponentLink3URL=https://datasheet.ciiva.com/25993/sbas444b-25993205.pdf?src-supplier=Avnet+Europe, Contact Plating=Gold, Conversion Rate=0.86KS/s, Integral Nonlinearity (INL)=1LSB, Interface=I2C, Lead Free="Lead Free", Manufacturer Part Number=ADS1115IDGST, Max Supply Voltage (DC)=5.5V, Min Supply Voltage (DC)=2V, Number of A/D Converters=1, Number of Bits=16, Number of Converters=1, Number of Inputs=4, Number of Pins=10, Packaging="Tape and Reel", Polarity=Bipolar, Pricing 1="1=5.62000, 10=5.04600, 25=4.77000, 100=3.92200, 250=3.51920, 500=3.39200, 1000=2.81960 (USD)", Radiation Hardening=No, REACH SVHC="No SVHC", Resolution=16b, RoHS=Yes, RoHS Compliant=Yes, Sampling Rate=860S/s, Series=-, Stock 1=7435, Supplier 1=Digi-Key, Supply Type=Single

## Via types
v1: diameter 29.53, hole 17.72, Top Layer to Bottom Layer, tented both sides, 107 vias

## Nets (pads, with @x,y where several pads share a name; then routed paths per layer and width w, separated by ;. In a path a pad name is that pad's centre, name@x,y a point inside that pad or via, vN(x,y) a via of type N, cw(c..) or ccw(c..) an arc to the next point about the centre after c; other vN are vias at no path point)
ADC1_ALT: R7.2 U2.19 U4.2 | length 1273.7
  Top Layer w6: U2.19 1317.52,1328.54 1344.09,1301.97 1457.87,1301.97 1475.62,1284.23 1475.62,1262.37 R7.2 1514.37,1262.01 1522.05,1254.33 1522.05,1144.88 1580.32,1086.61 v1(1580.32,1085.43) ; v1(1862.2,948.82) 1901.57,909.45 1901.57,858.27 1952.76,807.09 2083.86,807.09 2097.64,793.31 U4.2
  Bottom Layer w6: v1(1580.32,1085.43) 1589.76,1075.98 1818.5,1075.98 1862.2,1032.28 v1(1862.2,948.82)
ADC1_ALT_OUT_PI: J2.26 JP10.1 | length 391.7
  Top Layer w6: JP10.1 1367.32,1951.57 1457.48,1951.57 1479.48,1973.57 1479.48,2063.33 1529.53,2113.39 J2.26
ADC2_ALT: R8.2 U2.18 U5.2 | length 1137.3
  Top Layer w6: U2.18 1291.93,1332.09 1360.43,1263.58 1360.43,1262.01 R8.2 1415.55,1262.01 1430.71,1246.85 1430.71,1110.63 v1(1462.6,1078.74) ; v1(1811.02,948.43) 1874.02,885.43 1874.02,858.46 1951.97,780.51 U5.2
  Bottom Layer w6: v1(1462.6,1078.74) 1516.14,1078.74 1540.55,1054.33 1796.07,1054.33 1811.02,1039.37 v1(1811.02,948.43)
ADC2_ALT_OUT_PI: J2.29 JP13.1 | length 355.1
  Top Layer w6: JP13.1 1589.02,1876.38 J2.29
D+3.3V: C3.2 J25.1 J26.1 J27.1 J28.1 JP8.1 R3.1 R14.2 R15.2 U1.3 U2.2 | length 2148.8
  Top Layer w6: v1(412.99,817.32) v1@414.32,817.32
  Top Layer w10: v1(334.65,1842.52) 568.11,1609.06 1014.96,1609.06 1049.21,1574.8 1411.42,1574.8 1420.08,1583.46 1420.08,1622.83 U2.2 ; v1(353.94,864.96) 353.94,969.68 388.98,1004.72 R3.1 ; v1(429.53,1811.42) R15.2 ; v1(529.53,1811.42) R14.2
  Top Layer w16: v1(353.94,864.96) C3.2 ; v1@414.32,817.32 430.46,833.46 478.53,833.46 v1(537.4,833.46) ; v1(661.81,833.46) 720.66,833.46 v1(779.53,833.46) ; v1(859.84,771.65) JP8.1 v1(859.84,895.28)
  Bottom Layer w6: 355.51,1820.87 364.96,1811.42
  Bottom Layer w10: 364.96,1811.42 v1(429.53,1811.42) v1(529.53,1811.42)
D+5V: C2.2 C4.2 C5.2 C6.2 C7.2 C8.2 J1.6 J2.2 J2.4 J3.1 J4.1 J5.1 J6.1 J7.1 J8.1 J9.1 J10.1 J11.1 J12.1 J13.1 J14.1 J15.1 J16.1 J17.1 J18.1 J19.1 J20.1 J21.1 J22.1 J23.1 J24.1 JP9.1 R1.2 R2.1 R4.1 R5.1 R6.1 R7.1 R8.1 R9.1 R10.1 R11.1 R12.2 R13.1 U1.1 U3.16 U4.8 U5.1 U5.8 U6.16 U7.16 | length 7747.9
  Top Layer w6: C5.2 C5.2@1362.4,491.54 ; U6.16 1495.47,491.54 1575.98,572.05 1575.98,656.3 1687.4,767.72 1894.09,767.72 1919.68,742.13 U5.1 ; v1(1564.57,1157.48) R6.1 ; R5.1 R5.1@1653.54,1200.59 ; v1(2060.63,1018.5) v1@2064.57,1018.5 ; U4.8 2117.32,973.62 C6.2 C6.2@2128.74,985.83
  Top Layer w8: U5.8 1971.65,966.93 1991.34,986.61 C7.2
  Top Layer w10: 370.18,714.07 305.51,778.74 305.51,973.23 394.09,1061.81 R2.1 ; C7.2 v1(2060.63,1018.5) ; v1@2064.57,1018.5 2097.24,985.83 C6.2@2128.74,985.83
  Top Layer w16: v1(944.49,1157.48) R13.1 ; v1(1033.07,1157.48) R12.2 ; v1(1121.65,1157.48) R11.1 ; v1(1210.24,1157.48) R10.1 ; v1(1298.82,1157.48) R9.1 ; v1(1362.2,444.88) C5.2 ; C5.2@1362.4,491.54 U6.16 ; v1(1387.4,1157.48) R8.1 ; v1(1475.98,1157.48) R7.1 ; R1.2 1680.31,1392.52 1824.41,1536.61 v1(1918.11,1536.61) 1918.11,1744.09 1973.23,1799.21 2712.6,1799.21 2920.87,2007.48 J3.1 ; v1(1653.54,1157.48) R5.1@1653.54,1200.59 ; v1(1741.73,1157.48) R4.1 ; U3.16 C4.2 v1(2717.32,885.83) ; U7.16 C8.2 v1(2717.32,1322.83)
  Bottom Layer w16: v1(944.49,1157.48) v1(1033.07,1157.48) v1(1121.65,1157.48) v1(1210.24,1157.48) v1(1298.82,1157.48) v1(1387.4,1157.48) v1(1475.98,1157.48) v1(1564.57,1157.48) v1(1653.54,1157.48) v1(1741.73,1157.48) 1841.02,1157.48 1850.39,1166.85 1850.39,1468.9 v1(1918.11,1536.61) 2037.8,1536.61 2060.63,1513.78 v1(2060.63,1018.5) ; J19.1 1362.2,218.5 v1(1362.2,444.88) ; v1(2717.32,885.83) J8.1 ; v1(2717.32,1322.83) 3039.37,1322.83 3050.79,1334.25 J6.1
DOUT1: J2.13 J25.3 | length 1746.2
  Bottom Layer w6: J25.3 246.46,854.33 246.46,968.5 401.57,1123.62 756.3,1123.62 757.36,1122.56 861.42,1226.62 861.42,1948.78 J2.13
DOUT2: J2.11 J26.3 | length 1484.4
  Bottom Layer w6: J26.3 238.19,1014.57 401.57,1177.95 711.02,1177.95 829.53,1296.46 J2.11
DOUT3: J2.12 J27.3 | length 1421.6
  Bottom Layer w6: J27.3 652.76,1238.98 779.58,1365.8 779.58,2066.94 J2.12
DOUT4: J2.10 J28.3 | length 1065.1
  Bottom Layer w6: J28.3 498.03,1463.39 679.58,1644.93 679.58,2066.94 J2.10
GND: C1.1 C2.1 C3.1 C4.1 C5.1 C6.1 C7.1 C8.1 D1.2 D2.2 J1.5 J2.6 J2.9 J2.14 J2.20 J2.25 J2.30 J2.34 J2.39 J3.2 J4.2 J5.2 J6.2 J7.2 J8.2 J9.2 J10.2 J11.2 J12.2 J13.2 J14.2 J15.2 J16.2 J17.2 J18.2 J19.2 J20.2 J21.2 J22.2 J23.2 J24.2 J25.2 J26.2 J27.2 J28.2 JP1.1 MH1.1 MH2.1 MH3.1 MH4.1 U1.2 U2.1 U3.6 U3.7 U3.8 U4.1 U4.3 U4.5 U4.7 U5.3 U5.5 U5.7 U6.6 U6.7 U6.8 U7.6 U7.7 U7.8 | length 1704.7
  Top Layer w6: D2.2 D2.2@638.19,1003.54 ; U6.6 1814.96,740.74 1855.71,740.74 v1(1881.89,714.57) ; U6.7 1859.65,791.54 v1(1877.95,809.84) ; U6.8 v1(1814.17,901.57) ; v1(1956.3,683.86) 1956.3,686.76 1971.65,702.11 U5.3 ; U5.7 1991.34,963.78 1999.21,971.65 v1(2023.53,971.65) ; U5.5 2011.02,699.67 2020.47,690.22 v1(2020.47,683.86) ; v1(2070.08,683.86) 2070.08,690.22 2077.95,698.1 U4.1 ; v1(2110.24,683.86) 2110.24,690.22 2117.32,697.31 U4.3 ; U4.7 2137.01,872.05 2146.85,862.2 2184.25,862.2 2202.36,880.32 v1(2202.36,925.2) v1@2203.05,925.89 ; U4.5 2171.26,742.13 v1(2204.33,775.2) ; v1(2202.36,975.98) v1@2202.66,976.28 ; U7.8@2264.67,925.89 U7.8 ; U7.7@2265.06,976.28 U7.7
  Top Layer w10: C3.1 v1(400.79,969.68) ; C2.1 v1(583.65,660.63) ; D1.2 v1(680.12,1061.81) ; D2.2@638.19,1003.54 v1(680.12,1003.54) ; C1.1 v1(1611.42,1451.57)
  Top Layer w16: v1(1006.69,699.61) JP1.1 v1(1006.69,829.53) ; C7.1@1992.13,1077.56 v1(1992.13,1125.2) ; C6.1 v1(2129.13,1092.13) ; v1(2200.79,491.54) U3.8 ; v1(2200.79,541.54) U3.7 ; v1(2200.79,591.54) U3.6 ; v1(2202.36,1026.57) U7.6 ; v1@2202.66,976.28 U7.7@2265.06,976.28 ; v1@2203.05,925.89 U7.8@2264.67,925.89 ; C4.1 v1(2826.77,841.54) ; C8.1 v1(2826.77,1276.57)
  other v1: 476.38,377.95 1263.78,377.95 1854.33,377.95 2051.18,377.95 2248.03,377.95 3035.43,377.95 2149.61,574.8 2937.01,574.8 3330.71,574.8 2444.88,771.65 537.59,924.01 968.5,968.5 1559.06,968.5 1755.91,968.5 2346.46,968.5 2740.16,968.5 3133.86,968.5 3330.71,968.5 279.53,1165.35 870.08,1165.35 3035.43,1165.35 377.95,1362.2 574.8,1362.2 1755.91,1362.2 279.53,1559.06 673.23,1559.06 1460.63,1559.06 1657.48,1559.06 2838.58,1559.06 3035.43,1559.06 2149.61,1755.91 2346.46,1755.91 2543.31,1755.91 2740.16,1755.91 2937.01,1755.91 476.38,1952.76 1263.78,1952.76 2051.18,1952.76 2641.73,1952.76 3035.43,1952.76
INTRPT: J1.2 J2.8 | length 887.7
  Bottom Layer w6: J1.2 343.31,1639.37 403.15,1699.21 584.65,1699.21 609.84,1724.41 609.84,1902.76 579.58,1933.02 579.58,2066.94 J2.8
MUX1_S0: JP2.1 R4.2 U2.22 U3.11 U7.11 | length 3347.6
  Top Layer w6: U2.22 1394.29,1360.43 1406.3,1348.43 1686.22,1348.43 1741.73,1292.91 R4.2 1894.68,1262.01 1933.07,1300.39 1933.07,1375.98 1996.06,1438.98 2111.81,1438.98 2231.89,1559.06 2339.37,1666.54 2498.43,1666.54 2590.55,1574.41 2590.55,1522.05 JP2.1 v1(2590.94,1454.72) ; v1(2576.38,1026.57) U7.11 2639.37,1007.85 2635.86,1004.33 2544.88,1004.33 2512.99,972.44 2512.99,433.07 2547.64,398.43 2701.18,398.43 2740.16,437.4 2740.16,559.84 2708.47,591.54 U3.11
  Bottom Layer w6: v1(2576.38,1026.57) 2576.38,1440.16 v1(2590.94,1454.72)
MUX1_S1: JP3.1 R5.2 U2.21 U3.10 U7.10 | length 3239.2
  Top Layer w6: U2.21 1368.7,1354.92 1390.16,1333.46 1643.31,1333.46 1653.15,1323.62 R5.2 1688.22,1262.01 1691.73,1258.49 1691.73,1138.19 1707.88,1122.05 1879.53,1122.05 1973.62,1216.14 1973.62,1324.8 2005.12,1356.3 2120.47,1356.3 2376.77,1612.6 2475.2,1612.6 2501.18,1586.61 JP3.1 v1(2501.18,1454.72) ; v1(2576.38,976.57) 2542.13,942.32 2542.13,454.72 2572.44,424.41 2683.07,424.41 2710.63,451.97 2710.63,532.68 2701.77,541.54 U3.10 ; v1(2576.38,976.57) U7.10
  Bottom Layer w6: v1(2501.18,1454.72) 2501.19,1051.75 v1(2576.38,976.57)
MUX1_S2: JP4.1 R6.2 U2.20 U3.9 U7.9 | length 2746.3
  Top Layer w6: U2.20 1343.11,1331.3 1356.3,1318.11 1549.61,1318.11 1564.57,1303.15 R6.2 1600.59,1262.01 1612.2,1250.39 1612.2,1135.04 1644.88,1102.36 1917.32,1102.36 2008.27,1193.31 2008.27,1262.99 2022.44,1277.17 2103.54,1277.17 2348.03,1521.65 JP4.1 v1(2411.42,1454.72) ; v1(2576.42,926.53) 2576.42,506.65 2591.54,491.54 U3.9 ; v1@2576.45,926.55 U7.9@2639.35,926.55
  Bottom Layer w6: v1(2411.42,1454.72) 2439.37,1426.77 2439.37,1063.58 v1(2576.42,926.53)
MUX2_S0: JP5.1 R11.2 U2.15 U6.11 | length 942
  Top Layer w6: v1(1158.27,968.9) JP5.1 1158.27,893.7 1310.43,741.54 U6.11 ; v1(1165.75,1072.05) 1165.75,1251.97 1155.71,1262.01 R11.2 1121.65,1286.22 1148.43,1312.99 1179.13,1312.99 1215.16,1349.02 U2.15
  Bottom Layer w6: v1(1158.27,968.9) 1158.27,1064.57 v1(1165.75,1072.05)
MUX2_S1: JP6.1 R10.2 U2.16 U6.10 | length 785.2
  Top Layer w6: U2.16 1240.75,1340.13 1210.24,1309.62 R10.2 1247.27,1262.01 1254.13,1255.15 v1(1254.13,1071.46) ; v1(1250.39,968.9) JP6.1 1250.39,893.7 1352.56,791.54 U6.10
  Bottom Layer w6: v1(1250.39,968.9) 1250.39,1067.72 v1(1254.13,1071.46)
MUX2_S2: JP7.1 R9.2 U2.17 U6.9 | length 671.5
  Top Layer w6: U2.17 1266.34,1324.21 1298.82,1291.73 R9.2 1333.66,1262.01 1343.31,1252.36 v1(1343.31,1075.59) ; v1(1342.52,968.9) JP7.1 1342.52,893.7 1394.68,841.54 U6.9 U6.9@1439.72,841.97
  Bottom Layer w6: v1(1342.52,968.9) 1342.52,1074.8 v1(1343.31,1075.59)
NetC1_2: C1.2 R1.1 U2.23 U2.24 | length 143.4
  Top Layer w6: U2.23 U2.24 1449.61,1392.52 R1.1 1502.95,1448.62 C1.2
NetD1_1: D1.1 R2.2 | length 54.1
  Top Layer w10: R2.2 D1.1
NetD2_1: D2.1 R3.2 | length 54.1
  Top Layer w10: R3.2 D2.1
NetJ2_3: J2.3 R15.1 U2.12 | length 1049.9
  Top Layer w6: J2.3 R15.1 473.03,1916.34 479.92,1909.45 479.92,1783.86 503.15,1760.63 1062.99,1760.63 1160.04,1663.58 U2.12
NetJ2_5: J2.5 R14.1 U2.11 | length 961.6
  Top Layer w6: J2.5 R14.1 563.19,1916.34 571.65,1907.87 571.65,1814.96 599.61,1787.01 1068.5,1787.01 1189.57,1665.95 U2.11
NetJ2_15: J2.15 U2.10 | length 470.7
  Top Layer w6: J2.15 1029.53,1853.15 1215.16,1667.52 U2.10
NetJ2_16: J2.16 U2.9 | length 581.3
  Top Layer w6: J2.16 1079.58,2066.84 1079.58,1836.17 1240.75,1675 U2.9
NetJ2_18: J2.18 U2.8 | length 550.5
  Top Layer w6: J2.18 1129.53,2106.3 1179.58,2056.25 1179.58,1767.27 1266.34,1680.51 U2.8
NetJ2_31: J2.31 U2.4 | length 702.6
  Top Layer w6: U2.4 1368.7,1664.76 1390.16,1686.22 1591.34,1686.22 1829.53,1924.41 J2.31
NetJ2_32: J2.32 U2.5 | length 804.4
  Top Layer w6: U2.5 1343.11,1679.33 1375.98,1712.2 1555.91,1712.2 1779.48,1935.78 1779.48,2073.18 1823.19,2116.89 J2.32
NetJ2_36: J2.36 U2.3 | length 912.4
  Top Layer w6: U2.3 1394.29,1657.68 1403.15,1666.54 1668.5,1666.54 1979.58,1977.61 1979.58,2037.58 2017.68,2075.68 2017.68,2105.04 J2.36
NetJ3_3: J3.3 U7.1 | length 1303.9
  Top Layer w6: U7.1 2265.35,1319.29 2367.32,1421.26 2794.49,1421.26 J3.3
NetJ4_3: J4.3 U7.2 | length 1266.4
  Top Layer w6: U7.2 2320.28,1226.57 2333.86,1240.16 2333.86,1342.13 2393.31,1401.57 2929.13,1401.57 3106.3,1578.74 3176.38,1578.74 J4.3
NetJ5_3: J5.3 U7.4 | length 1249.2
  Top Layer w6: U7.4 2329.72,1126.57 2363.39,1160.24 2363.39,1320.87 2420.47,1377.95 2979.13,1377.95 3061.42,1460.24 J5.3
NetJ6_3: J6.3 U7.5 | length 1309.6
  Top Layer w6: U7.5 2370.28,1076.57 2390.55,1096.85 2390.55,1310.63 2438.19,1358.27 2930.31,1358.27 3052.76,1235.83 J6.3
NetJ7_3: J7.3 U7.15 | length 732
  Top Layer w6: U7.15 2830.35,1226.57 3045.51,1011.42 J7.3
NetJ8_3: J8.3 U7.14 | length 804.3
  Top Layer w6: U7.14 2787.99,1176.57 3172.55,792.01 3277.28,792.01 J8.3@3282.28,787.01
NetJ9_3: J9.3 U7.13 | length 936.3
  Top Layer w6: U7.13 2771.06,1126.57 3220.47,677.17 3220.47,575.2 3233.07,562.6 J9.3
NetJ10_3: J10.3 U7.12 | length 1101
  Top Layer w6: U7.12 2765.94,1076.57 3192.91,649.61 3192.91,389.76 3244.49,338.19 J10.3
NetJ11_3: J11.3 U3.15 | length 1041.3
  Top Layer w6: U3.15 2910.04,791.54 3133.86,567.72 3133.86,350.39 3228.35,255.91 3299.61,184.65 J11.3
NetJ12_3: J12.3 U3.14 | length 876.7
  Top Layer w6: U3.14 2873.03,741.54 3075.2,539.37 J12.3
NetJ13_3: J13.3 U3.13 | length 679.5
  Top Layer w6: U3.13 2780.51,691.54 2850.79,621.26 J13.3
NetJ14_3: J14.3 U3.12 | length 639.9
  Top Layer w6: J14.3 2626.38,255.12 2783.46,412.2 2783.46,592.91 2734.84,641.54 U3.12
NetJ15_3: J15.3 U3.4 | length 708.1
  Top Layer w6: J15.3 2125.2,282.68 2185.04,342.52 2257.87,342.52 2348.82,433.46 2348.82,657.48 2314.76,691.54 U3.4
NetJ16_3: J16.3 U3.5 | length 688.6
  Top Layer w6: J16.3 1900.79,410.63 2131.69,641.54 U3.5
NetJ17_3: J17.3 U6.1 | length 366.3
  Top Layer w6: J17.3 1676.38,232.68 1814.17,370.47 U6.1
NetJ18_3: J18.3 U6.2 | length 550.9
  Top Layer w6: J18.3 1451.97,183.53 1588.91,320.47 1714.17,445.73 1714.17,512.6 1743.11,541.54 U6.2
NetJ19_3: J19.3 U6.4 | length 848.6
  Top Layer w6: J19.3 1227.56,183.53 1334.98,290.94 1499.61,290.94 1687.4,478.74 1687.4,600 1728.94,641.54 U6.4
NetJ20_3: J20.3 U6.5 | length 1085.4
  Top Layer w6: J20.3 1003.15,183.53 1149.55,329.92 1448.43,329.92 1653.94,535.43 1653.94,642.52 1702.95,691.54 U6.5
NetJ21_3: J21.3 U6.15 | length 867.6
  Top Layer w6: J21.3 778.74,280.32 861.81,363.39 1087.8,363.39 1265.94,541.54 U6.15
NetJ22_3: J22.3 U6.14 | length 1107.2
  Top Layer w6: J22.3 554.33,270.87 729.13,445.67 1098.03,445.67 1243.9,591.54 U6.14
NetJ23_3: J23.3 U6.13 | length 1404
  Top Layer w6: J23.3 329.92,359.06 471.26,500.39 1052.76,500.39 1193.9,641.54 U6.13
NetJ24_3: J24.3 U6.12 | length 1310
  Top Layer w6: J24.3 1003.15,565.75 1128.74,691.34 1439.96,691.34 U6.12
NetJP10_2: JP10.2 U2.7 | length 153.4
  Top Layer w6: U2.7 1292.03,1623.13 1292.03,1776.28 JP10.2
NetJP13_2: JP13.2 U2.6 | length 227.6
  Top Layer w6: U2.6 1317.52,1706.5 1387.4,1776.38 JP13.2
NetU3_3: U3.3 U4.4 | length 214.4
  Top Layer w6: U4.4 2137.01,699.21 2148.43,687.8 2187.8,687.8 2203.54,703.54 2203.54,731.1 2213.98,741.54 U3.3
NetU4_6: U4.6 U7.3 | length 334.5
  Top Layer w6: U4.6 2156.69,937.99 2170.08,951.38 2170.08,1129.53 2217.13,1176.57 U7.3
NetU5_4: U5.4 U6.3 | length 314.7
  Top Layer w6: U6.3 1969.09,591.54 1991.34,613.78 U5.4
SCL: J1.3 JP12.1 R13.2 U2.13 U4.10 U5.10 | length 2794.8
  Top Layer w6: J1.3 183.46,1688.19 339.76,1688.19 635.19,1392.76 JP12.1 ; U2.13 1160,1392.76 JP12.1 ; U4.10 2077.95,864.17 2050.39,836.61 1955.91,836.61 1932.28,860.24 U5.10 1932.28,988.98 1911.42,1009.84 1057.09,1009.84 986.22,1080.71 986.22,1250.39 974.61,1262.01 R13.2 944.49,1287.8 972.83,1316.14 986.55,1329.86 JP12.1
SDA: J1.4 JP11.1 R12.1 U2.14 U4.9 U5.9 | length 2960.6
  Top Layer w6: J1.4 326.77,1737.8 580.86,1483.7 JP11.1 1131.26,1483.7 1189.57,1425.39 U2.14 1189.57,1359.25 1163.39,1333.07 1077.17,1333.07 1033.07,1288.98 R12.1 1065.94,1262.01 1077.17,1250.79 1077.17,1055.91 1105.51,1027.56 1928.35,1027.56 1951.97,1003.94 U5.9 1951.97,876.38 1972.05,856.3 2027.56,856.3 2046.46,875.2 2046.46,947.64 2059.45,960.63 2086.61,960.63 2097.64,949.61 U4.9
SHTDWN: J1.1 J2.7 | length 823.4
  Bottom Layer w6: J1.1 184.65,1591.73 378.35,1591.73 444.88,1658.27 612.6,1658.27 629.53,1675.2 J2.7
pads on no net: J2.1 J2.17 J2.19 J2.21 J2.22 J2.23 J2.24 J2.27 J2.28 J2.33 J2.35 J2.37 J2.38 J2.40 U3.1 U3.2 U5.6

## Polygon pours and split planes (outlines as drawn)
GND on Top Layer "GND_L01_P010" (solid, remove dead copper, pour order 10): 3464.57,2204.72 0,2204.72 0,0 3464.57,0
D+5V on Top Layer "D+5V_L-01_P-001" (solid, remove dead copper, pour order 6): 185 vertices, not listed, extent -4.06,0 3464.57,2204.72
GND on Bottom Layer "GND_L02_P013" (solid, remove dead copper, pour order 13): 3464.57,2204.72 0,2204.72 0,0 3464.57,0
D+3.3V on Bottom Layer "Bottom Layer-D+3.3V" (solid, remove dead copper, pour order 11): 94.88,664.57 111.81,647.64 219.69,647.64 310.63,738.58 334.65,762.6 362.99,790.94 622.83,790.94 675.2,738.58 857.09,738.58 922.05,803.54 922.05,867.72 829.13,960.63 703.15,960.63 619.29,876.77 453.15,876.77 433.07,896.85 351.18,896.85 332.68,878.35 332.68,807.87 220.87,696.06 139.76,696.06 130.71,705.12 130.71,872.05 138.98,880.32 219.27,880.31 224.41,885.39 224.41,916.54 220.47,920.47 138.58,920.47 130.71,928.35 130.71,1097.24 138.58,1105.12 216.54,1105.12 224.41,1112.99 224.42,1144.88 138.58,1144.88 130.71,1152.76 130.71,1321.26 138.58,1329.13 218.5,1329.13 224.41,1335.04 224.41,1365.35 220.47,1369.29 138.58,1369.29 130.71,1377.17 130.71,1868.11 141.34,1878.74 225.98,1878.74 285.89,1819.36 312.98,1792.52 377.95,1792.52 377.95,1892.13 346.85,1923.23 103.94,1923.23 94.88,1914.17

## Other copper
Top Layer:
  pour cut-out: 596.48,1779.47 596.48,1773.99 601.57,1768.9
  pour cut-out: 2420.47,1386.11 2414.57,1392.01 2414.57,1393.31
  pour cut-out: 2932.26,1394.04 2940.07,1386.22 2937.01,1386.22

## Silkscreen, mask and mechanical layers (free items; w line width, h text height)
Top Overlay:
  text "DAQ-2-A" at 2567.13,2090.11 h60
  text "2" at 2556.7,1922.61 h157.48
  text "Raspberry Pi" at 690.45,1901.33 h32.2
  text "z" at 2556.99,1830.6 h78.74
  text "ADC2_OUT" at 1216.17,1676.28 h32.2 r90
  text "ADC1_OUT" at 1529.95,1676.28 h32.2 r90
  text "MUX1_S1" at 2411.32,1588.98 h32.2
  text "IMU_SHTDWN" at 274.41,1544.78 h32.2 r90
  text "MUX1_S2" at 2136.91,1506.69 h32.2
  text "MUX1_S0" at 2658.17,1506.69 h32.2
  text "SDA" at 830.61,1472.46 h32.2
  text "SCL" at 834.55,1379.16 h32.2
  text "MUX 3: J3-10" at 2320.37,1332.97 h32.2
  text "DOUT4" at 319.29,1306.19 h32.2 r90
  text "DOUT3" at 319.29,1081.49 h32.2 r90
  text "MUX2_S0" at 904.72,915.35 h32.2
  text "MUX2_S2" at 1404.23,909.03 h32.2
  text "DOUT2" at 319.29,857.64 h32.2 r90
  text "3V3" at 912.99,821.65 h32.2
  text "MUX2_S1" at 1167.32,799.21 h32.2
  text "GND" at 1057.48,762.99 h32.2
  text "5V" at 912.99,668.5 h32.2
  text "DOUT1" at 319.29,635.04 h32.2 r90
  text "MUX 1: J11-J16" at 2313.29,408.56 h32.2
  text "AOUT22" at 339.1,407.54 h32.2 r90
  text "MUX 2: J17-J24" at 1339.66,351.08 h32.2
Bottom Overlay:
  text "DAQ-2-A" at 3175.79,2090.11 h60
  text "2" at 3186.22,1922.61 h157.48
  text "z" at 3185.93,1830.6 h78.74
  text "5V" at 303.38,1820.47 h32.2
  text "ADC2_OUT" at 1215.75,1792.52 h32.2
  text "ADC1_OUT" at 1769.68,1792.52 h32.2
  text "GND" at 327.78,1771.16 h32.2
  text "SDA" at 327.45,1719.19 h32.2
  text "SCL" at 330.74,1660.63 h32.2
  text "INTRPT" at 390.1,1611.32 h32.2
  text "SHTDWN" at 422.15,1559.35 h32.2
  text "DOUT" at 151.18,1447.64 h32.2
  text "GND" at 144.98,1398.33 h32.2
  text "DOUT4" at 415.89,1396.09 h32.2
  text "3V3" at 144.98,1346.36 h32.2
  text "DOUT3" at 422.94,1177.19 h32.2
  text "DOUT2" at 423.33,952.78 h32.2
  text "DOUT1" at 423.16,725.61 h32.2
  text "AOUT" at 153.54,539.37 h32.2
  text "GND" at 147.34,498.72 h32.2
  text "5V" at 147.34,452.26 h32.2
  text "5V" at 3377.26,426.28 h32.2
  text "GND" at 3407.86,371.55 h32.2
  text "AOUT" at 3449.67,310.63 h32.2
  text "5V" at 2209.74,97.54 h32.2 r270
  text "5V" at 3387.7,98.33 h32.2 r270
  text "GND" at 3332.97,67.73 h32.2 r270
  text "GND" at 2155.02,66.94 h32.2 r270
  text "AOUT" at 3272.05,25.92 h32.2 r270
  text "AOUT" at 2094.09,25.13 h32.2 r270
Mechanical 1:
  the board outline again, w10
Board Outline:
  the board outline again, w10

## Dimensions
0,2204.72 to 3464.57,2204.72 on Drill Guide
0,2204.72 to 0,0 on Drill Guide